# EAGLE board lcd (EAGLE 9.6.2)
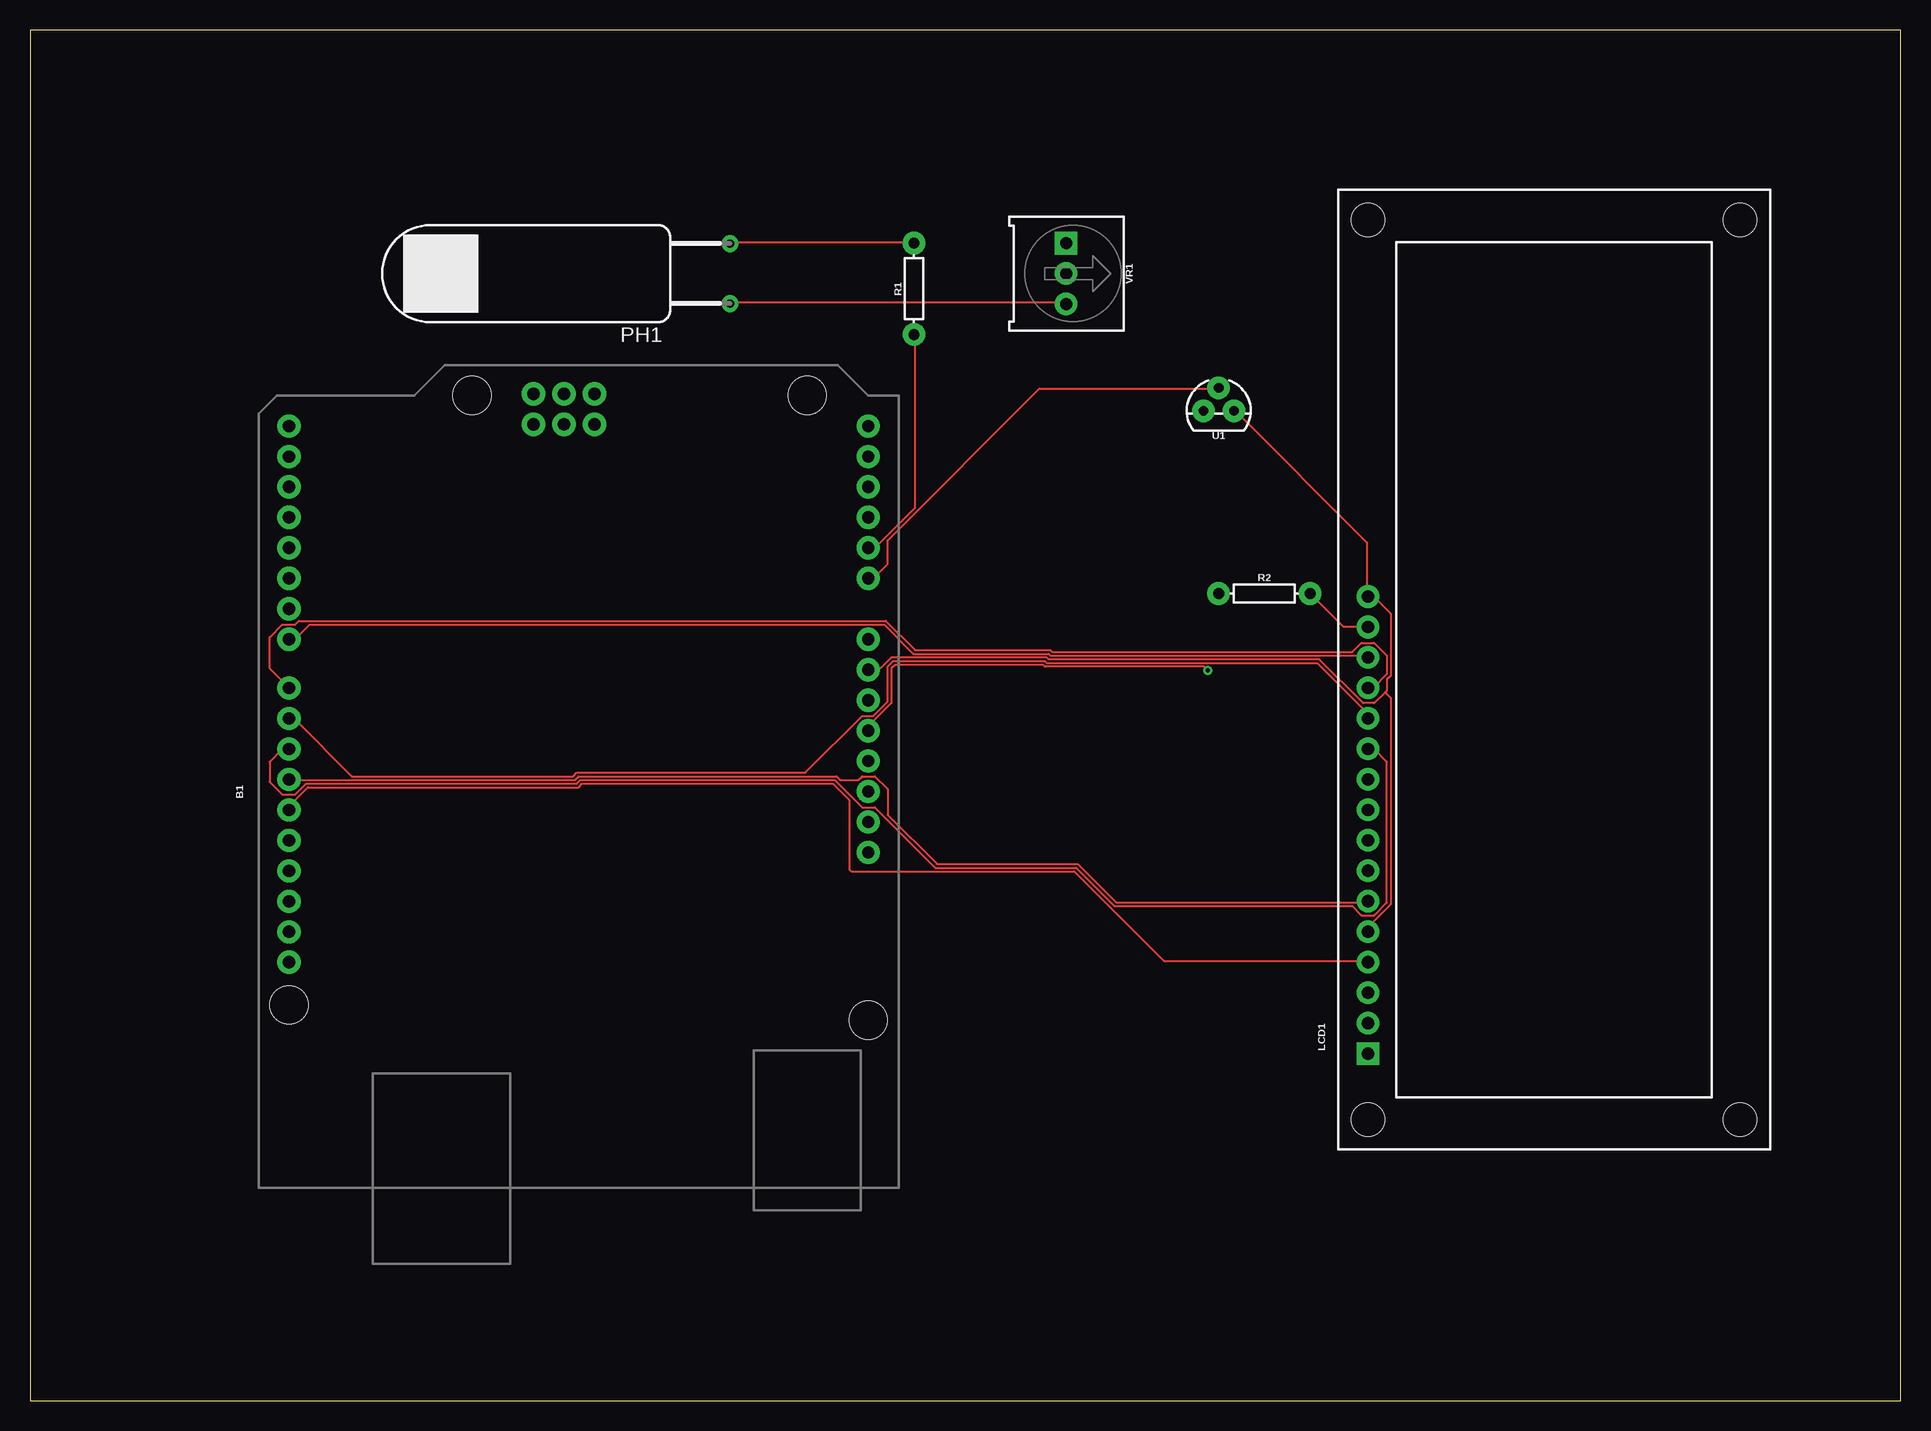
[diagram p0: board, top side]
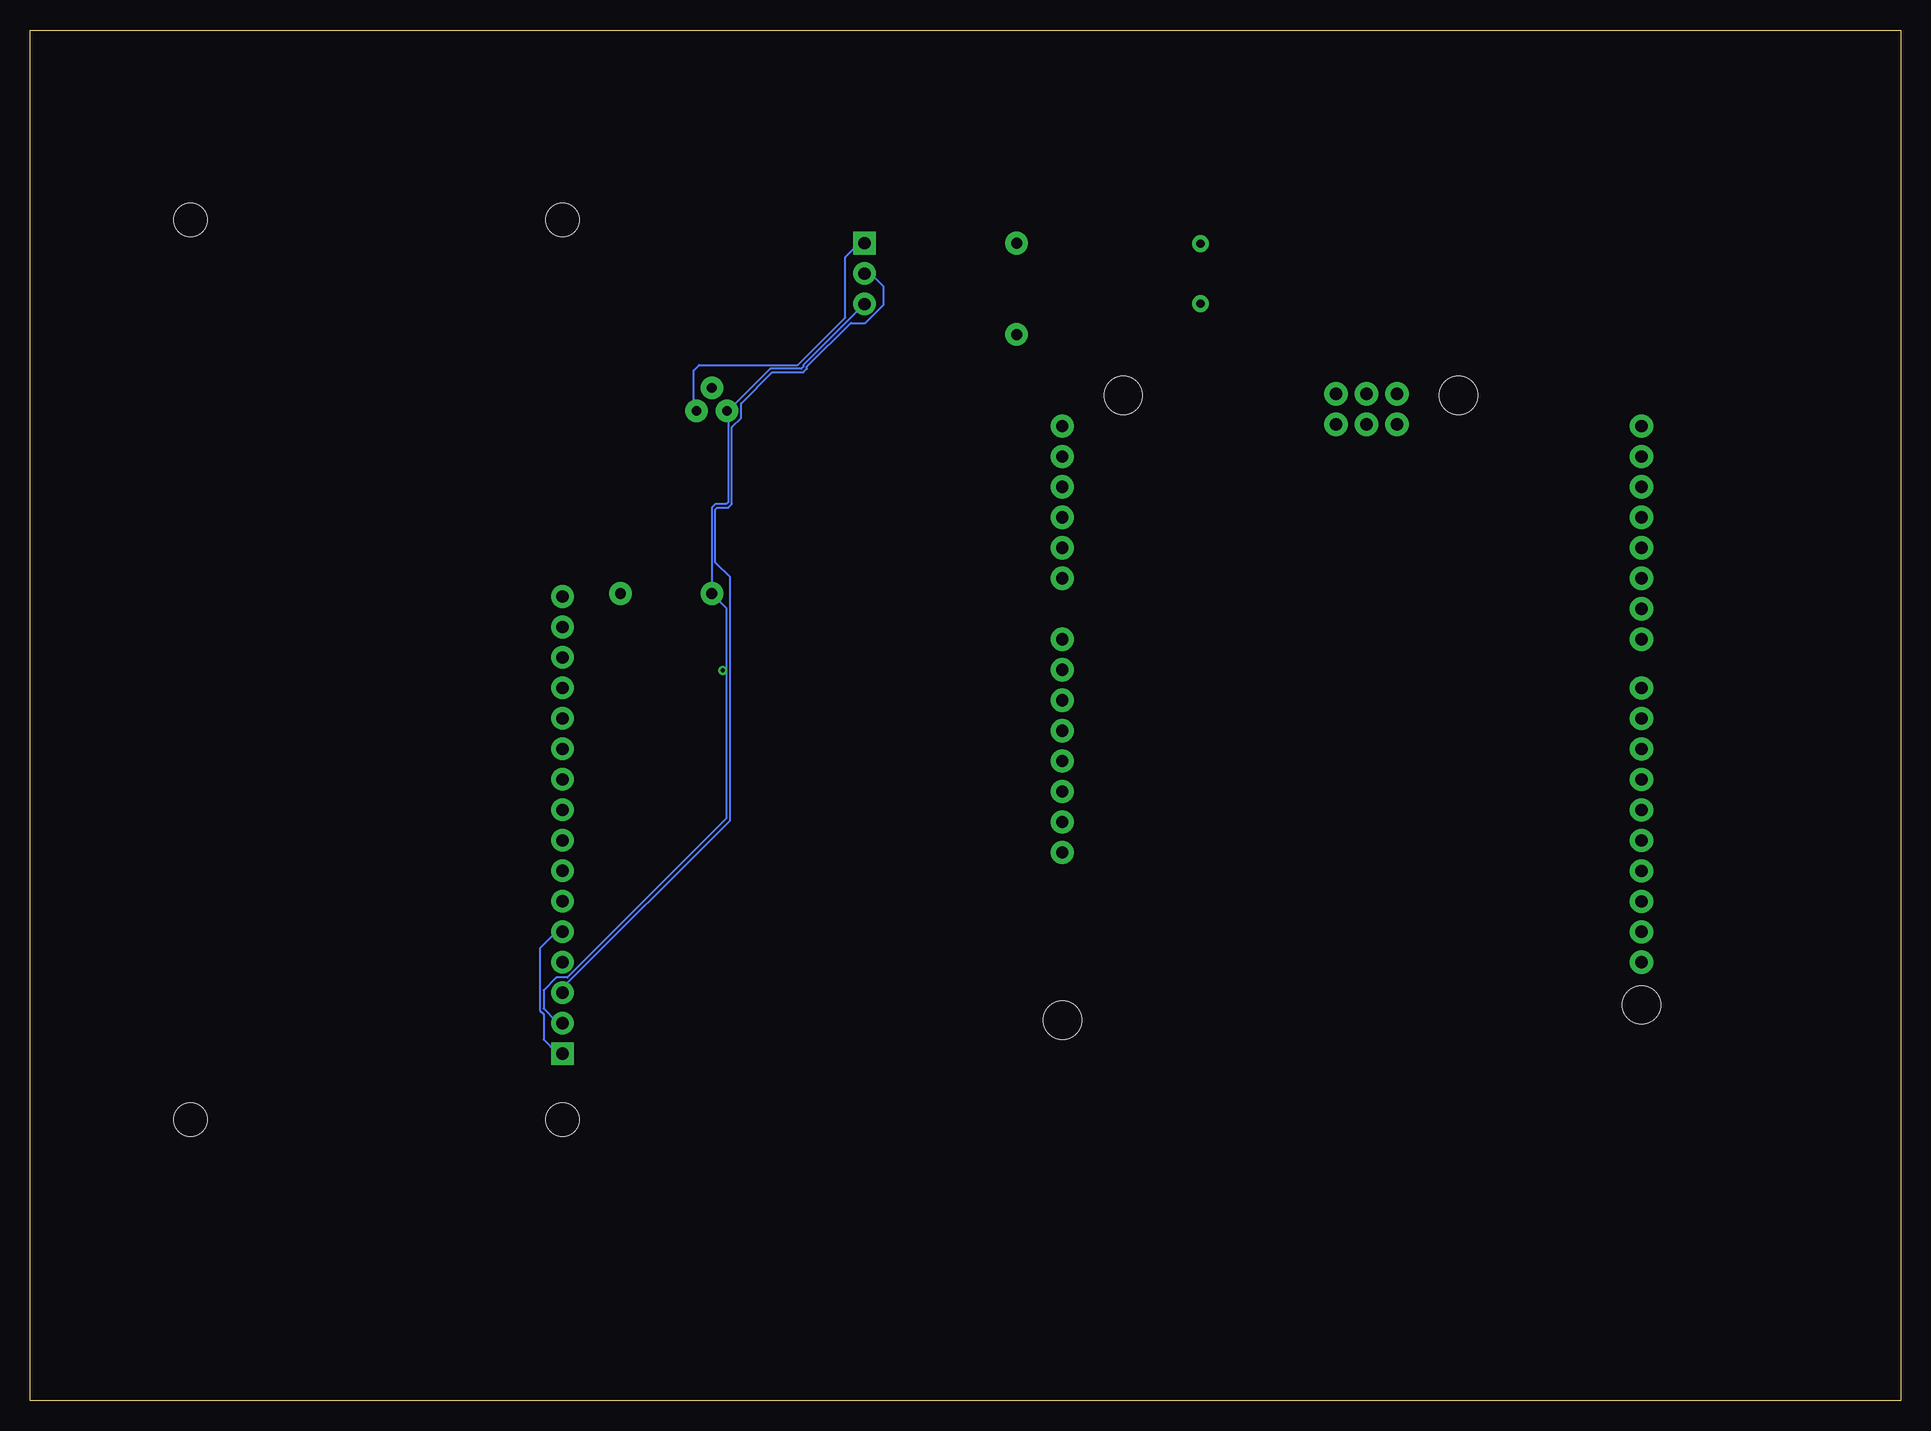
[diagram p1: board, bottom side, seen from below]

Size 155.88 x 114.29 mm. Coordinates in mm from the lower left corner, seen from the top.
Outline: 0,0 155.88,0 155.88,114.29 0,114.29 0,0
Copper layers (1*16): Top 0.035mm / dielectric 1.5mm / Bottom 0.035mm
Design rules "default": minimum track width 6mil, minimum drill 0.35mm, track to track 6mil, track to pad 6mil, pad to pad 6mil, via to via 6mil, smd to smd 6mil, copper to edge 40mil, drill to drill 6mil, minimum pad ring 10mil, minimum via ring 8mil, stop-mask expansion 4mil, vias tented up to drill 0mil, thermal gap 10mil

## Footprints (pad centres in the part's own frame; a part is rotated, then mirrored left to right if it is on the bottom)
ARDUINO_R3 = drill 1.016 pad 1.93: 3.3V 2.54,-24.13; 5V 5.08,-24.13; A0 17.78,-24.13; A1 20.32,-24.13; A2 22.86,-24.13; A3 25.4,-24.13; A4 27.94,-24.13; A5 30.48,-24.13; AREF -9.144,24.13; D0 30.48,24.13; D1 27.94,24.13; D2 25.4,24.13; D3 22.86,24.13; D4 20.32,24.13; D5 17.78,24.13; D6 15.24,24.13; D7 12.7,24.13; D8 8.636,24.13; D9 6.096,24.13; D10 3.556,24.13; D11 1.016,24.13; D12 -1.524,24.13; D13 -4.064,24.13; GND@1 7.62,-24.13; GND@2 10.16,-24.13; GND@3 -6.604,24.13; GND@4 33.16,-1.32; IOREF -2.54,-24.13; MISO 30.62,3.76; MOSI 33.16,1.22; NC -5.08,-24.13; RESET@1 0,-24.13; RESET@2 30.62,-1.32; SCK 30.62,1.22; SCL -14.224,24.13; SDA -11.684,24.13; VCC 33.16,3.76; VIN 12.7,-24.13 | hole 3.175: -17.78,24.13; 33.02,8.89; 33.02,-19.05; -19.05,-24.13
LCD-16X2 = drill 1.016 pad 1.88 square: 1 -32,15.5 | drill 1.016 pad 1.88: 2 -29.46,15.5; 3 -26.92,15.5; 4 -24.38,15.5; 5 -21.84,15.5; 6 -19.3,15.5; 7 -16.76,15.5; 8 -14.22,15.5; 9 -11.68,15.5; 10 -9.14,15.5; 11 -6.6,15.5; 12 -4.06,15.5; 13 -1.52,15.5; 14 1.02,15.5; 15 3.56,15.5; 16 6.1,15.5 | hole 2.8: -37.5,15.5; -37.5,-15.5; 37.5,15.5; 37.5,-15.5
D11XX_H = drill 0.7 pad 1.4: 1 -2.5,-5; 2 2.5,-5
AXIAL-0.3 = drill 0.9 pad 1.88: P$1 -3.81,0; P$2 3.81,0
TO-92 = drill 0.813 pad 1.88: 1 -1.27,0; 2 0,1.905; 3 1.27,0
TRIMPOT-PTH-3386U = drill 1.016 pad 1.88 square: 1 -2.54,-0.015 | drill 1.016 pad 1.88: 2 0,-0.015; 3 2.54,-0.015

## Placement (x,y rotation side)
B1  ARDUINO_UNO_R3  [ARDUINO_R3]  45.72,50.8 90 top
LCD1  LCD-16X2SILK  [LCD-16X2]  127,60.96 90 top
PH1  PHOTOCELLD11  [D11XX_H]  53.34,93.98 90 top
R1  10K OHM  [AXIAL-0.3]  73.66,92.71 90 top
R2  220 OHM  [AXIAL-0.3]  102.87,67.31 0 top
U1  [TO-92]  99.06,82.55 0 top
VR1  10k  [TRIMPOT-PTH-3386U]  86.36,93.98 270 top

## Library data of the parts
B1 = SparkFun-Boards
LCD1 = SparkFun-Displays; PROD_ID: LCD-12633; SF_ID: LCD-00255
PH1 = photo-elements
R1 R2 = SparkFun-Resistors
U1 = SparkFun-Sensors; PROD_ID: IC-09880; SF_ID: SEN-10988
VR1 = SparkFun-Resistors; PROD_ID: RES-09730; SF_SKU: COM-09806

## Nets
N$1: B1.A1 R1.P$1
N$2: B1.A0 U1.2
N$3: B1.5V LCD1.2 PH1.1 R2.P$1 U1.1 VR1.3
N$4: B1.GND@2 LCD1.1 LCD1.5 LCD1.16 U1.3 VR1.1
N$5: PH1.2 R1.P$2
N$6: LCD1.3 VR1.2
N$7: LCD1.15 R2.P$2
N$8: B1.D7 LCD1.14
N$9: B1.D12 LCD1.4
N$10: B1.D11 LCD1.6
N$11: B1.D9 LCD1.12
N$12: B1.D8 LCD1.13
N$13: B1.D10 LCD1.11

## Tracks (layer width: path | path; a pad name or v marks a point on that pad's centre or on a via)
N$1
  Top 0.152: B1.A1 70.41,71.12 73.76,74.47 73.76,88.8 R1.P$1
N$2
  Top 0.152: U1.2 99.06,84.38 84.12,84.38 71.48,71.73 71.48,69.75 70.41,68.68 69.95,68.68 B1.A0
N$3  (via drill 0.35)
  Top 0.152: PH1.1 58.37,91.54 86.26,91.54 VR1.3 | v98.15,60.91 97.84,61.21 84.58,61.21 84.43,61.37 72.08,61.37 71.78,61.06 71.78,58.17 69.95,56.34 69.95,55.88 B1.5V
  Bottom 0.152: 97.69,82.55 94.18,86.05 91.59,86.05 91.44,86.21 91.44,86.36 86.41,91.39 VR1.3 | 97.69,82.55 97.69,74.93 97.84,74.78 98.75,74.78 99.06,74.47 R2.P$1 97.84,66.09 97.84,60.91 | 97.69,82.55 U1.1 | 97.84,60.91 97.84,48.56 111.1,35.31 112.01,35.31 113.08,34.24 113.08,32.72 112.01,31.65 111.56,31.65 LCD1.2 | 97.84,60.91 v98.15,60.91
N$4
  Top 0.152: U1.3 100.43,82.55 111.4,71.58 111.4,67.16 LCD1.16 111.56,67 112.01,67 113.39,65.63 113.39,60.45 113.08,60.15 113.08,59.23 112.93,59.08 | 112.93,59.08 112.01,58.17 111.1,58.17 107.44,61.82 84.89,61.82 84.73,61.98 71.78,61.98 70.87,61.06 69.95,61.06 B1.GND@2 | 112.93,59.08 113.39,58.62 113.39,41.4 111.56,39.57 111.56,39.27 LCD1.5
  Bottom 0.152: LCD1.1 111.56,29.06 112.01,29.06 113.08,30.12 113.08,32.26 113.39,32.56 113.39,37.74 112.01,39.12 111.56,39.12 LCD1.5 | VR1.1 86.41,96.42 86.87,96.42 87.94,95.35 87.94,90.32 91.9,86.36 100.13,86.36 100.58,85.9 100.58,82.7 100.43,82.55 U1.3
N$5
  Top 0.152: PH1.2 58.37,96.57 73.61,96.57 R1.P$2
N$6
  Bottom 0.152: VR1.2 85.8,93.98 84.73,92.91 84.73,91.39 86.26,89.86 87.48,89.86 91.13,86.21 91.13,86.05 91.44,85.75 94.03,85.75 96.62,83.16 96.62,81.94 97.38,81.18 97.38,74.78 97.69,74.47 98.6,74.47 98.75,74.32 98.75,69.9 97.54,68.68 97.54,48.41 111.4,34.54 111.4,34.09 LCD1.3
N$7
  Top 0.152: R2.P$2 109.42,64.57 111.4,64.57 LCD1.15
N$8
  Top 0.152: B1.D7 22.1,63.5 23.32,64.72 71.17,64.72 73.61,62.28 84.89,62.28 85.04,62.13 111.4,62.13 LCD1.14
N$9
  Top 0.152: LCD1.4 111.4,36.68 94.49,36.68 87.02,44.14 68.43,44.14 68.28,44.3 68.28,50.09 66.9,51.46 46.03,51.46 45.72,51.16 23.16,51.16 21.64,49.63 21.64,49.33 B1.D12
N$10
  Top 0.152: LCD1.6 111.4,41.55 90.53,41.55 87.33,44.75 75.59,44.75 71.48,48.87 71.48,51 70.41,52.07 69.34,52.07 69.04,51.77 67.51,51.77 67.21,52.07 45.72,52.07 45.41,51.77 21.64,51.77 B1.D11
N$11
  Top 0.152: LCD1.12 111.4,56.95 111.4,57.4 107.29,61.52 84.73,61.52 84.58,61.67 71.93,61.67 71.48,61.21 71.48,58.32 70.26,57.1 69.34,57.1 64.62,52.38 45.57,52.38 45.26,52.07 26.82,52.07 22.1,56.79 21.64,56.79 B1.D9
N$12
  Top 0.152: B1.D8 19.96,61.06 19.96,63.65 21.03,64.72 22.1,64.72 22.4,65.02 71.32,65.02 73.76,62.59 85.04,62.59 85.19,62.43 110.19,62.43 110.95,63.19 112.01,63.19 113.08,62.13 113.08,60.6 112.01,59.54 111.56,59.54 LCD1.13
N$13
  Top 0.152: B1.D10 21.03,54.36 19.96,53.29 19.96,51.61 21.03,50.55 22.1,50.55 23.01,51.46 45.57,51.46 45.87,51.77 67.06,51.77 69.34,49.48 70.41,49.48 75.44,44.45 87.17,44.45 90.37,41.25 110.19,41.25 110.95,40.49 112.01,40.49 113.08,41.55 113.08,53.29 112.01,54.36 111.56,54.36 LCD1.11